# Altium PCB PCB1.PcbDoc
Units mm, origin at the board's own origin, x right, y up, seen from the top; angles counter-clockwise.
Board outline 152.4 x 101.6 mm, 2 copper layers (Top Layer, Bottom Layer); 41 components, 51 nets, 168 pads, 60 vias.
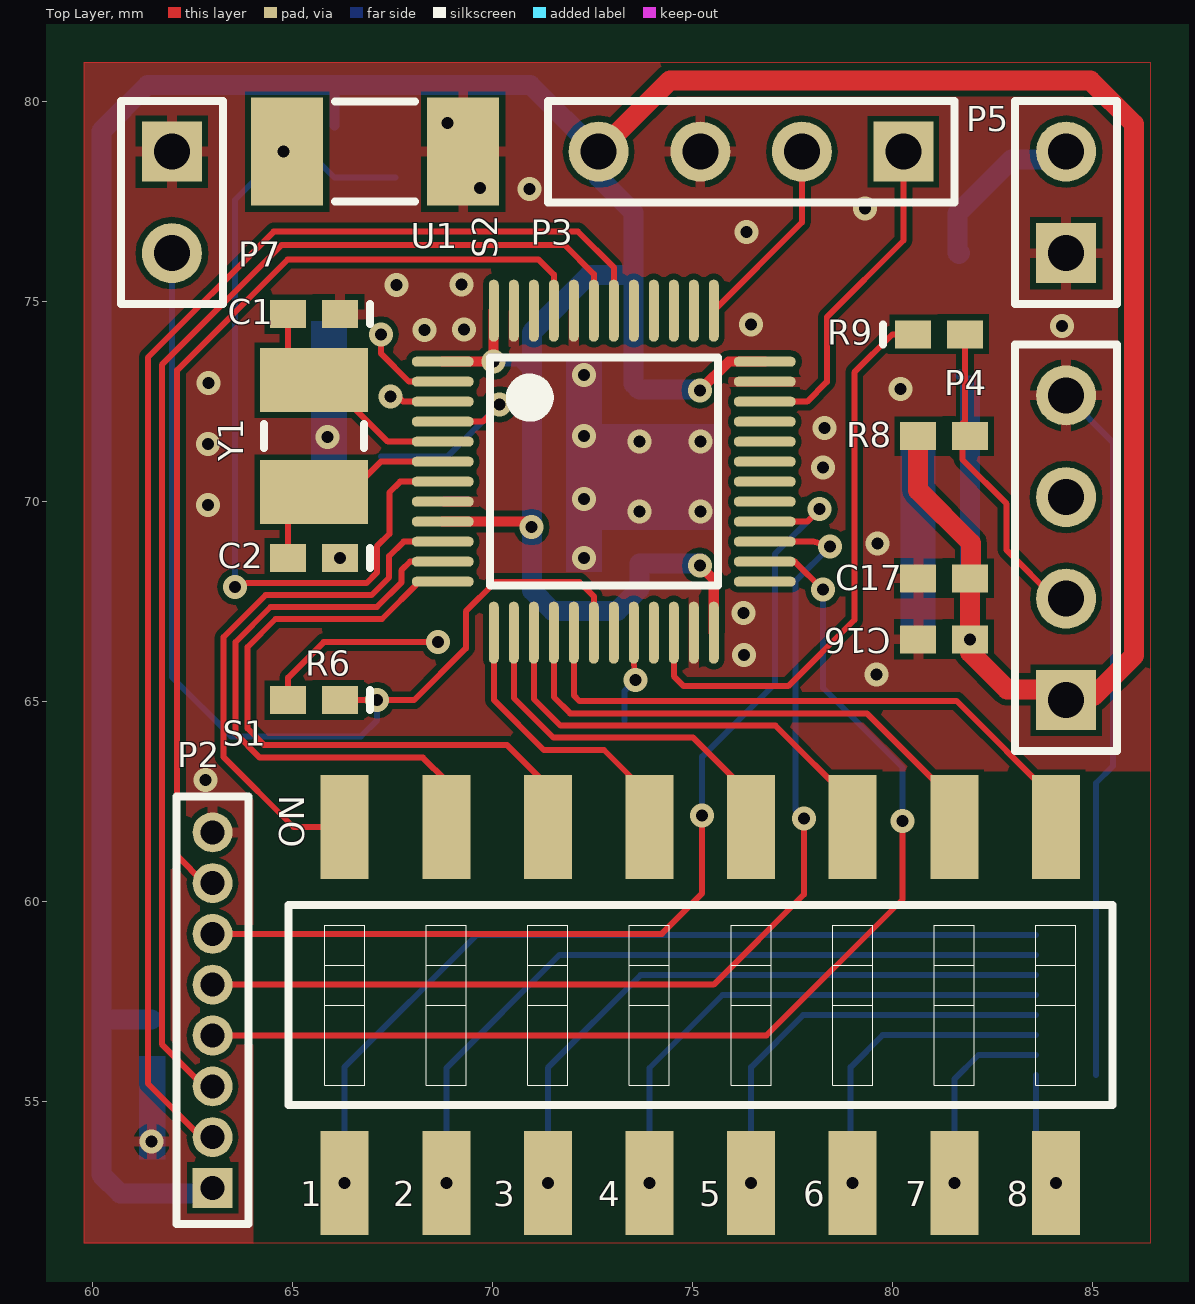
[diagram p0: Top Layer view]
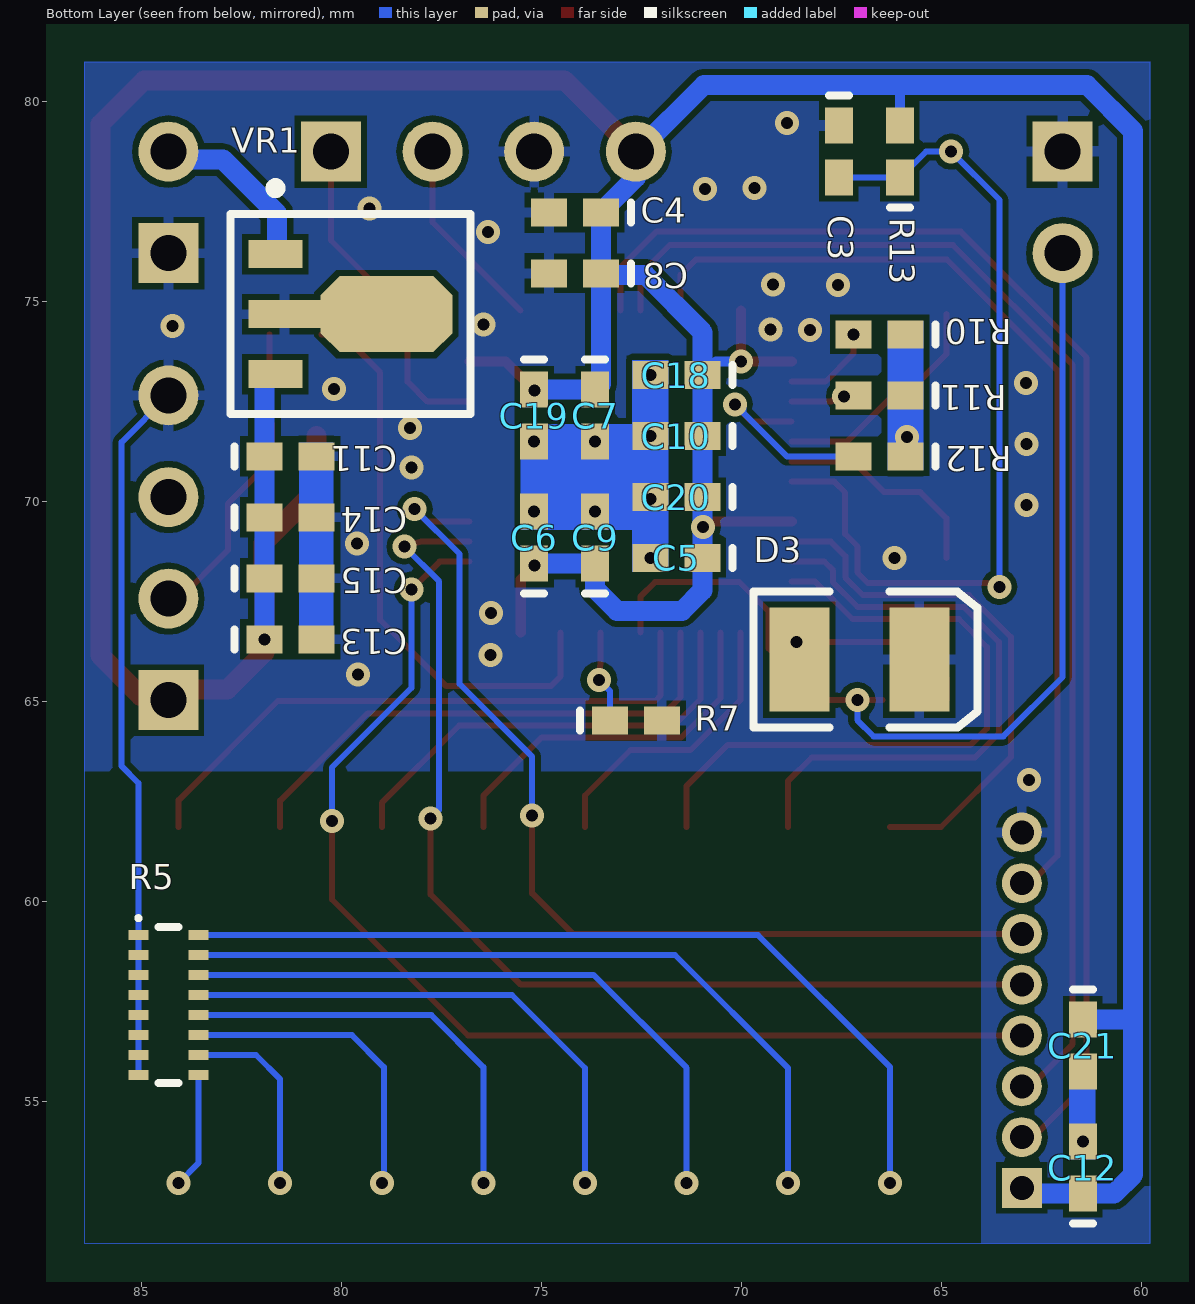
[diagram p1: Bottom Layer view, seen from below]

## Layer stack, top to bottom
Top Layer: signal copper 0.0356
Dielectric: dielectric 0.32, FR-4, Dk 4.8
Bottom Layer: signal copper 0.0356

## Board outline
25.4,25.4 177.8,25.4 177.8,127 25.4,127

## Design rules (kind name [scope] priority, off if disabled: settings)
Clearance [All] p1: gap=0.15
ComponentClearance [All] p1: gap=0.254 collisioncheckmode=3 verticalgap=0.254
PolygonConnect [All] p1: connectstyle=Relief reliefconductorwidth=0.254 reliefentries=4 polygonreliefangle="90 Angle"
RoutingVias [All] p1: holewidth=0.3 width=0.6 viastyle="Through Hole" minholewidth=0.3 minwidth=0.6 maxholewidth=0.3 maxwidth=0.6
SolderMaskExpansion [All] p1: expansion=0.102
TestPointUsage [All] p1: valid=0 allowmultiple=FALSE
Testpoint [All] p1: side=15 testpointundercomponent=TRUE minsize=1.016 maxsize=2.54 preferedsize=1.524 minholesize=0 maxholesize=1.016 preferedholesize=0.813 testpointgrid=0.025 style=1023 order=0-112345678
Width Width_1 [InNet('VCC')] p1: maxlimit=0.5 minlimit=0.254 preferedwidth=0.5
Width [All] p2: maxlimit=0.5 minlimit=0.15 preferedwidth=0.15
18 further rules are at their usual default settings.

## Components (designator, comment, footprint, x,y, rotation, side; value= is the part's Value field where it differs from the comment)
C1 "Cap" 0402 65.532,74.676 r180 top
C2 "Cap" 0402 65.532,68.58 r180 top
C3 "Cap" 0402 67.564,78.74 r270 bottom
C4 "Cap Pol3" 0402 74.168,77.216 r0 bottom
C5 "Cap Pol3" 0402 71.628,68.58 r0 bottom
C6 "Cap Pol3" 0402 75.184,69.088 r90 bottom
C7 "Cap Pol3" 0402 73.66,72.136 r270 bottom
C8 "Cap Pol3" 0402 74.168,75.692 r0 bottom
C9 "Cap Pol3" 0402 73.66,69.088 r90 bottom
C10 "Cap Pol3" 0402 71.628,71.628 r0 bottom
C11 "Cap Pol3" 0402 81.28,71.12 r180 bottom
C12 "Cap Pol3" 0402 61.468,53.34 r90 bottom
C13 "Cap Pol3" 0402 81.28,66.548 r180 bottom
C14 "Cap Pol3" 0402 81.28,69.596 r180 bottom
C15 "Cap Pol3" 0402 81.28,68.072 r180 bottom
C16 "Cap Pol3" 1005[0402] 81.28,66.548 r180 top
C17 "Cap Pol3" 1005[0402] 81.28,68.072 r180 top
C18 "Cap Pol3" 0402 71.628,73.152 r0 bottom
C19 "Cap Pol3" 0402 75.184,72.136 r270 bottom
C20 "Cap Pol3" 0402 71.628,70.104 r0 bottom
C21 "Cap Pol3" 0402 61.468,56.388 r270 bottom
D3 "LED3" 3.5X2.8X1.9 67.056,66.04 r180 bottom
P2 "MHDR1X8" MHDR1X8 62.992,52.832 r90 top
P3 "Header 4" HDR1X4 80.264,78.74 r180 top
P4 "Header 4" HDR1X4 84.328,65.024 r90 top
P5 "Header 2" HDR1X2 84.328,76.2 r90 top
P7 "Header 2" HDR1X2 61.976,78.74 r270 top (schematic designator P5)
R5 "Res Pack3" EXB2HV 84.328,57.404 r270 bottom net-tie
R6 "Res Semi" 0402 65.532,65.024 r180 top
R7 "Res Semi" 0402 72.644,64.516 r180 bottom
R8 "Res Semi" 1005[0402] 81.28,71.628 r180 top
R9 "Res Semi" 0402 81.153,74.168 r0 top
R10 "Res Semi" 0402 66.548,74.168 r0 bottom
R11 "Res Semi" 0402 66.548,72.644 r0 bottom
R12 "Res Semi" 0402 66.548,71.12 r0 bottom
R13 "Res Semi" 0402 66.04,78.74 r90 bottom
S1 "SW DIP-8" DIP_SW_8WAY_SMD 75.184,57.404 r0 top
S2 "SW-PB" 5025[2010] 67.056,78.74 r180 top
U1 "STM32F103C8T6" LQFP48_L 72.771,70.739 r0 top net-tie
VR1 "Volt Reg" SOT89 80.264,74.676 r270 bottom net-tie
Y1 "XTAL" 3225[1210] 65.532,71.628 r90 top

## Footprints (in the part's own frame and the unit in brackets; to place one, negate y for a bottom-side part, rotate by r counter-clockwise, add the part's x,y. Pads: shape width x height; smd on the part's side, far side on the other; paste and mask are expansions set on the pad)
3.5X2.8X1.9 [mm] "SM LED; 2 C-Bend Leads; Body 3.5 x 2.8 x 1.9 mm, inc leads (LxWxH typ)"
  rect 1.5x2.6 smd: 1(-1.5,0) 2(1.5,0)
  silkscreen extent -2.65,-1.7 2.95,1.7
0402 [mm] "Chip Capacitor; Body 1.0 x 0.5 mm (LxW typ)"
  rect 0.9x0.7 smd: 1(-0.65,0) 2(0.65,0)
  silkscreen extent -1.4,-0.25 -1.4,0.25
1005[0402] [mm] "Chip Resistor; Body 1.1 x 0.5 mm (LxW typ)"
  rect 0.9x0.7 smd: 1(-0.65,0) 2(0.65,0)
3225[1210] [mm] "Chip Resistor; Body 3.2 x 2.5 mm (LxW typ)"
  rect 1.6x2.7 smd: 1(-1.4,0) 2(1.4,0)
  silkscreen extent -0.3,-1.25 0.3,1.25
5025[2010] [mm] "Chip Resistor; Body 5.0 x 2.5 mm (LxW typ)"
  rect 1.8x2.7 smd: 1(-2.2,0) 2(2.2,0)
  silkscreen extent -1,-1.25 1,1.25
DIP_SW_8WAY_SMD [mm] "DIP Switch; 16 Leads"
  rect 1.2x2.6 smd: 1(-8.89,-4.45) 2(-6.35,-4.45) 3(-3.81,-4.45) 4(-1.27,-4.45) 5(1.27,-4.45) 6(3.81,-4.45) 7(6.35,-4.45) 8(8.89,-4.45) 9(8.89,4.45) 10(6.35,4.45) 11(3.81,4.45) 12(1.27,4.45) 13(-1.27,4.45) 14(-3.81,4.45) 15(-6.35,4.45) 16(-8.89,4.45)
  silkscreen extent -10.29,-2.5 10.31,2.5
EXB2HV [mm] "Chip Resistor Array, (0402x8); SM; 16 Leads; Body 3.90 x 1.70 mm (LxW max)"
  rect 0.25x0.5 smd: 1(-1.75,-0.75) 2(-1.25,-0.75) 3(-0.75,-0.75) 4(-0.25,-0.75) 5(0.25,-0.75) 6(0.75,-0.75) 7(1.25,-0.75) 8(1.75,-0.75) 9(1.75,0.75) 10(1.25,0.75) 11(0.75,0.75) 12(0.25,0.75) 13(-0.25,0.75) 14(-0.75,0.75) 15(-1.25,0.75) 16(-1.75,0.75)
  silkscreen extent -2.22,-0.8 1.95,0.25
HDR1X2 [mm] "Connector; Header; 2 Position"
  rect 1.5x1.5 hole 0.9: 1(0,0)
  round 1.5 hole 0.9: 2(2.54,0)
  silkscreen extent -1.27,-1.27 3.81,1.27
HDR1X4 [mm] "Connector; Header; 4 Position"
  rect 1.5x1.5 hole 0.9: 1(0,0)
  round 1.5 hole 0.9: 2(2.54,0) 3(5.08,0) 4(7.62,0)
  silkscreen extent -1.27,-1.27 8.89,1.27
LQFP48_L [mm]
  oval 1.55x0.25 smd: 1(-4.025,2.75) 2(-4.025,2.25) 3(-4.025,1.75) 4(-4.025,1.25) 5(-4.025,0.75) 6(-4.025,0.25) 7(-4.025,-0.25) 8(-4.025,-0.75) 9(-4.025,-1.25) 10(-4.025,-1.75) 11(-4.025,-2.25) 12(-4.025,-2.75) 25(4.025,-2.75) 26(4.025,-2.25) 27(4.025,-1.75) 28(4.025,-1.25) 29(4.025,-0.75) 30(4.025,-0.25) 31(4.025,0.25) 32(4.025,0.75) 33(4.025,1.25) 34(4.025,1.75) 35(4.025,2.25) 36(4.025,2.75)
  oval 0.25x1.55 smd: 13(-2.75,-4.025) 14(-2.25,-4.025) 15(-1.75,-4.025) 16(-1.25,-4.025) 17(-0.75,-4.025) 18(-0.25,-4.025) 19(0.25,-4.025) 20(0.75,-4.025) 21(1.25,-4.025) 22(1.75,-4.025) 23(2.25,-4.025) 24(2.75,-4.025) 37(2.75,4.025) 38(2.25,4.025) 39(1.75,4.025) 40(1.25,4.025) 41(0.75,4.025) 42(0.25,4.025) 43(-0.25,4.025) 44(-0.75,4.025) 45(-1.25,4.025) 46(-1.75,4.025) 47(-2.25,4.025) 48(-2.75,4.025)
  silkscreen extent -2.85,-2.85 2.85,2.85
MHDR1X8 [mm] "Connector; Header; 8 Position"
  rect 1x1 hole 0.6: 1(0,0)
  round 1 hole 0.6: 2(1.27,0) 3(2.54,0) 4(3.81,0) 5(5.08,0) 6(6.35,0) 7(7.62,0) 8(8.89,0)
  silkscreen extent -0.9,-0.9 9.79,0.9
SOT89 [mm] "SOT-89; Body 4.6 x 4.25 mm, inc. leads (LxW max)"
  oct 1.9x3.3 smd: 0(0,1.388)
  rect 0.7x1.35 smd: 1(-1.5,-1.388) 3(1.5,-1.388)
  rect 0.7x1.8 smd: 2(0,-1.162)
  silkscreen extent -3.27,-2.51 2.5,3.49

## Part data
C1 C2 C3: "Capacitor"
C4 C5 C6 C7 C8 C9 C10 C11 C12 C13 C14 C15 C16 C17 C18 C19 C20 C21: "Polarized Capacitor (Surface Mount)"
D3: "Typical BLUE SiC LED"
P2: "Header, 8-Pin"
P3 P4: "Header, 4-Pin"
P5 P7: "Header, 2-Pin"
R5: "Isolated Resistor Network"
R6 R7 R8 R9 R10 R11 R12 R13: "Semiconductor Resistor"
S1: "DIP Switch, 8 Position, SPST"
S2: "Switch"
U1: "STM32 ARM-based 32-bit MCU with 64 Kbytes Flash, 48-pin LQFP, Industrial Temperature"
VR1: "Voltage Regulator"
Y1: "Crystal Oscillator"

## Via types
v1: diameter 0.6, hole 0.3, Top Layer to Bottom Layer, 60 vias

## Nets (pads, with @x,y where several pads share a name; then routed paths per layer and width w, separated by ;. In a path a pad name is that pad's centre, name@x,y a point inside that pad or via, vN(x,y) a via of type N, cw(c..) or ccw(c..) an arc to the next point about the centre after c; other vN are vias at no path point)
CE: P2.2 U1.42 | length 34.7
  Top Layer w0.15: P2.2 62.711,54.102 61.376,55.436 61.376,73.597 64.519,76.739 72.128,76.739 73.021,75.846 U1.42
CSN: P2.3 U1.43 | length 31.9
  Top Layer w0.15: P2.3 62.775,55.372 61.722,56.425 61.722,73.408 64.719,76.405 71.793,76.405 72.521,75.677 U1.43
GND: C1.1 C2.1 C3.1 C4.2 C5.2 C6.2 C7.2 C8.2 C9.2 C10.2 C11.2 C12.2 C13.2 C14.2 C15.2 C16.2 C17.2 C18.2 C19.2 C20.2 C21.2 D3.2 P2.8 P3.3 P4.4 P5.1 P7.1 R5.1 R5.2 R5.3 R5.4 R5.5 R5.6 R5.7 R5.8 R7.2 R10.1 R11.1 R12.1 S2.1 U1.8 U1.23 U1.35 U1.44 U1.47 VR1.2 | length 17.6
  Bottom Layer w0.15: P4.4 85.498,71.474 85.498,63.374 85.078,62.954 R5.8
  other v1: 61.468,53.99 62.813,63.029 79.591,65.669 76.275,66.155 76.264,67.208 66.182,68.58 72.278,68.58 79.618,68.936 73.66,69.738 75.184,69.738 62.878,69.903 72.274,70.054 78.251,70.848 62.878,71.426 73.66,71.486 75.184,71.486 65.869,71.609 72.278,71.628 78.284,71.831 80.19,72.808 62.888,72.949 72.278,73.152 68.288,74.282 69.277,74.293 84.224,74.385 76.453,74.423 67.592,75.4 69.217,75.411 76.34,76.734 79.299,77.317 70.913,77.809 69.676,77.83 68.861,79.45
IRQ: P2.7 U1.45 | length 24.9
  Top Layer w0.15: P2.7 62.787,60.452 62.105,61.133 62.105,73.278 64.865,76.037 71.145,76.037 71.521,75.661 U1.45
MISO: P2.6 U1.28 | length 25
  Top Layer w0.15: P2.6 74.221,59.182 75.233,60.194 v1(75.233,62.143) ; U1.28 77.859,69.489 v1(78.17,69.8)
  Bottom Layer w0.15: v1(75.233,62.143) 75.233,63.612 77.053,65.432 77.053,68.683 v1(78.17,69.8)
MOSI: P2.5 U1.27 | length 26.5
  Top Layer w0.15: P2.5 75.516,57.912 77.776,60.172 v1(77.776,62.062) ; U1.27 78.015,68.989 v1(78.43,68.866)
  Bottom Layer w0.15: v1(77.776,62.062) 77.56,62.278 77.56,67.997 v1(78.43,68.866)
NetC1_2: C1.2 U1.5 Y1.2 | length 5.8
  Top Layer w0.15: C1.2 64.882,73.678 Y1.2 65.833,73.028 67.372,71.489 U1.5
NetC2_2: C2.2 U1.6 Y1.1 | length 5.4
  Top Layer w0.15: C2.2 64.882,69.578 Y1.1 66.437,70.228 67.198,70.989 U1.6
NetC3_2: C3.2 R13.1 S2.2 U1.7 | length 21.8
  Top Layer w0.15: v1(63.553,67.856) 63.855,67.954 66.841,67.954 67.1,68.213 67.1,68.872 67.414,69.185 67.414,70.222 67.681,70.489 U1.7 ; v1(64.759,78.74) S2.2
  Bottom Layer w0.15: v1(63.553,67.856) 63.553,77.533 v1(64.759,78.74) 65.39,78.74 R13.1 C3.2
NetD1_2: 
NetD2_1: 
NetD3_1: D3.1 R6.2 | length 4.7
  Top Layer w0.15: R6.2 64.882,65.589 65.767,66.474 v1(68.629,66.474)
NetD4_1: 
NetK1_1: 
NetK1_2: 
NetK1_3: 
NetK2_1: 
NetK2_2: 
NetK2_3: 
NetP3_1: P3.2 U1.37 | length 4.9
  Top Layer w0.15: U1.37 77.724,76.967 P3.2
NetP3_2: P3.1 U1.34 | length 8.3
  Top Layer w0.15: U1.34 77.857,72.489 78.349,72.981 78.349,74.601 80.264,76.516 P3.1
NetP4_2: P4.2 R8.1 R9.2 | length 7.9
  Top Layer w0.15: R9.2 81.803,72.009 81.74,71.946 81.74,71.037 82.841,69.935 82.841,68.774 84.052,67.564 P4.2
NetP5_2: P5.2 VR1.1 | length 4.4
  Bottom Layer w0.5: VR1.1 81.676,76.2 81.611,76.2 81.611,77.188 82.96,78.538 P5.2@84.364,78.538
NetQ1_2: 
NetQ1_3: 
NetQ2_1: 
NetQ4_2: 
NetR1_1: P7.2 R6.1 U1.18 | length 25.9
  Top Layer w0.15: R6.1@66.482,65.024 68.026,65.024 69.325,66.323 69.325,67.246 70.06,67.981 72.16,67.981 72.521,67.62 U1.18
  Bottom Layer w0.15: P7.2 61.976,65.599 63.455,64.12 66.701,64.12 67.106,64.525 v1(67.106,65.024)
NetR5_9: R5.9 S1.8 | length 2.9
  Bottom Layer w0.15: R5.9 83.578,53.45 v1(84.074,52.954)
NetR5_10: R5.10 S1.7 | length 4.9
  Bottom Layer w0.15: v1(81.534,52.954) 81.534,55.549 82.139,56.154 R5.10
NetR5_11: R5.11 S1.6 | length 7.9
  Bottom Layer w0.15: v1(78.994,52.954) 78.943,53.005 78.943,55.852 79.744,56.654 R5.11
NetR5_12: R5.12 S1.5 | length 10.6
  Bottom Layer w0.15: v1(76.454,52.954) 76.454,55.853 77.755,57.154 R5.12
NetR5_13: R5.13 S1.4 | length 13.3
  Bottom Layer w0.15: v1(73.914,52.954) 73.914,55.829 75.739,57.654 R5.13
NetR5_14: R5.14 S1.3 | length 16
  Bottom Layer w0.15: v1(71.374,52.954) 71.374,55.833 73.695,58.154 R5.14
NetR5_15: R5.15 S1.2 | length 18.8
  Bottom Layer w0.15: v1(68.834,52.954) 68.834,55.825 71.663,58.654 R5.15
NetR5_16: R5.16 S1.1 | length 21.6
  Bottom Layer w0.15: v1(66.294,52.954) 66.294,55.856 69.592,59.154 R5.16
NetR7_1: R7.1 U1.20 | length 2.3
  Top Layer w0.15: U1.20 73.521,65.961 v1(73.57,65.534)
  Bottom Layer w0.15: R7.1 73.294,65.259 v1(73.57,65.534)
NetR9_1: R9.1 U1.22 | length 14.4
  Top Layer w0.15: U1.22 74.521,65.625 74.768,65.378 77.382,65.378 79.034,67.03 79.034,73.219 79.984,74.168 R9.1
NetR10_2: R10.2 U1.2 | length 2.3
  Top Layer w0.15: v1(67.198,74.168) 67.198,73.693 67.902,72.989 U1.2
NetR11_2: R11.2 U1.3 | length 1.4
  Top Layer w0.15: v1(67.441,72.619) 67.624,72.619 67.754,72.489 U1.3
NetR12_2: R12.2 U1.4 | length 5.3
  Top Layer w0.15: U1.4 69.743,71.989 70.168,72.414 v1(70.168,72.419)
  Bottom Layer w0.15: R12.2 68.868,71.12 v1(70.168,72.419) ; v1@69.957,72.209 v1@69.957,72.446
NetS1_9: S1.9 U1.17 | length 15.4
  Top Layer w0.15: U1.17 72.021,65.144 72.16,65.005 81.594,65.005 84.074,62.525 S1.9
NetS1_10: S1.10 U1.16 | length 13.4
  Top Layer w0.15: U1.16 71.521,65.104 71.931,64.695 79.35,64.695 81.534,62.511 S1.10
NetS1_11: S1.11 U1.15 | length 11.3
  Top Layer w0.15: U1.15 71.021,65.054 71.683,64.391 77.062,64.391 78.994,62.459 S1.11
NetS1_12: S1.12 U1.14 | length 9.4
  Top Layer w0.15: U1.14 70.521,65.078 71.514,64.086 75.007,64.086 76.454,62.639 S1.12
NetS1_13: S1.13 U1.13 | length 7.4
  Top Layer w0.15: U1.13 70.021,65.033 71.275,63.779 72.776,63.779 73.914,62.641 S1.13
NetS1_14: S1.14 U1.12 | length 16.7
  Top Layer w0.15: U1.12 68.162,67.989 67.226,67.054 64.565,67.054 63.866,66.355 63.866,64.316 64.274,63.909 70.346,63.909 71.374,62.881 S1.14
NetS1_15: S1.15 U1.11 | length 15.4
  Top Layer w0.15: U1.11 67.927,68.489 67.711,68.272 67.711,67.964 67.1,67.354 64.441,67.354 63.566,66.479 63.566,64.192 64.168,63.59 68.251,63.59 68.834,63.007 S1.15
NetS1_16: S1.16 U1.10 | length 13.5
  Top Layer w0.15: S1.16 65.014,61.854 63.266,63.601 63.266,66.604 64.316,67.654 66.968,67.654 67.403,68.089 67.403,68.623 67.769,68.989 U1.10
SCK: P2.4 U1.26 | length 29
  Top Layer w0.15: P2.4 76.838,56.642 80.239,60.043 v1(80.239,62.003) ; U1.26 77.549,68.489 v1(78.251,67.786)
  Bottom Layer w0.15: v1(78.251,67.786) 78.251,65.335 80.239,63.347 v1(80.239,62.003)
VCC: C4.1 C5.1 C6.1 C7.1 C8.1 C9.1 C10.1 C11.1 C12.1 C13.1 C14.1 C15.1 C16.1 C17.1 C18.1 C19.1 C20.1 C21.1 P2.1 P3.4 P4.1 R8.2 R13.2 U1.1 U1.9 U1.24 U1.36 U1.48 VR1.3 | length 123.1
  Top Layer w0.254: U1.9 70.83,69.489 v1(70.967,69.352) ; U1.1 v1(70.016,73.489) U1.48@70.016,74.759 ; v1(75.173,68.391) 75.521,68.043 U1.24 ; v1(75.173,72.77) 75.892,73.489 U1.36
  Top Layer w0.5: P3.4 74.423,80.519 84.937,80.519 86.027,79.429 86.027,66.139 85.02,65.132 P4.1@84.328,65.132 ; R8.2 80.63,70.273 81.951,68.952 81.951,68.072 C17.1 81.93,66.219 82.852,65.297 83.93,65.297 P4.1@84.328,65.132 ; P4.1 P4.1@84.328,65.132
  Bottom Layer w0.254: R13.2 66.04,80.323 66.123,80.406 ; v1(70.016,73.489) 70.641,73.489 C18.1 ; VR1.3 VR1.3@81.93,72.898
  Bottom Layer w0.5: 60.234,57.038 C21.1 ; P2.1 62.85,52.69 60.683,52.69 60.21,53.163 60.21,79.25 61.366,80.406 70.94,80.406 72.606,78.74 P3.4 72.644,78.09 C4.1 73.518,72.928 C7.1 C19.1 ; C8.1@73.518,75.654 72.403,75.654 70.972,74.223 70.972,73.171 70.978,73.165 70.978,67.77 71.491,67.257 73.111,67.257 73.66,67.806 C9.1 C6.1 ; v1(81.93,66.548) VR1.3@81.93,72.898
pads on no net: P4.3 U1.19 U1.21 U1.25 U1.29 U1.30 U1.31 U1.32 U1.33 U1.38 U1.39 U1.40 U1.41 U1.46 VR1.0

## Polygon pours and split planes (outlines as drawn)
GND on Top Layer "Top Layer-No Net" (solid): 59.778,80.978 86.438,80.978 86.438,63.25 64.012,63.25 64.012,51.446 59.778,51.446 59.778,80.978
GND on Top Layer "Top Layer-No Net" (solid): 59.778,80.978 86.438,80.978 86.438,51.446 59.778,51.446 59.778,80.978
GND on Bottom Layer "Top Layer-No Net" (solid): 59.778,80.978 59.778,51.446 64.012,51.446 64.012,63.245 86.438,63.245 86.438,80.978 59.778,80.978
GND on Bottom Layer "Top Layer-No Net" (solid): 59.778,80.978 86.438,80.978 86.438,51.446 59.778,51.446 59.778,80.978

## Other copper
Bottom Layer:
  rectangle net GND: 61.15,53.541 61.808,56.133
  rectangle net GND: 71.831,68.229 72.733,73.532
  rectangle net GND: 71.912,69.277 75.524,71.928
  rectangle net GND: 80.195,66.209 81.065,71.469
  rectangle net GND: 65.453,70.778 66.35,74.509

## Silkscreen, mask and mechanical layers (free items; w line width, h text height)
Mechanical 1:
  lines w0.15: 59.697,81.054 86.513,81.054 86.513,51.37 59.702,51.37 59.702,81.054

## Text inside footprints (layer, text, board x,y; h text height)
S1: Top Overlay "8" at 82.843,52.372 h0.62; Top Overlay "7" at 80.303,52.372 h0.62; Top Overlay "ON" at 65.278,61.341 h0.62 r90; Top Overlay "1" at 65.178,52.372 h0.62; Top Overlay "2" at 67.503,52.372 h0.62; Top Overlay "3" at 70.003,52.372 h0.62; Top Overlay "4" at 72.628,52.372 h0.62; Top Overlay "5" at 75.153,52.372 h0.62; Top Overlay "6" at 77.753,52.372 h0.62